# EAGLE board board (EAGLE 9.7.0)
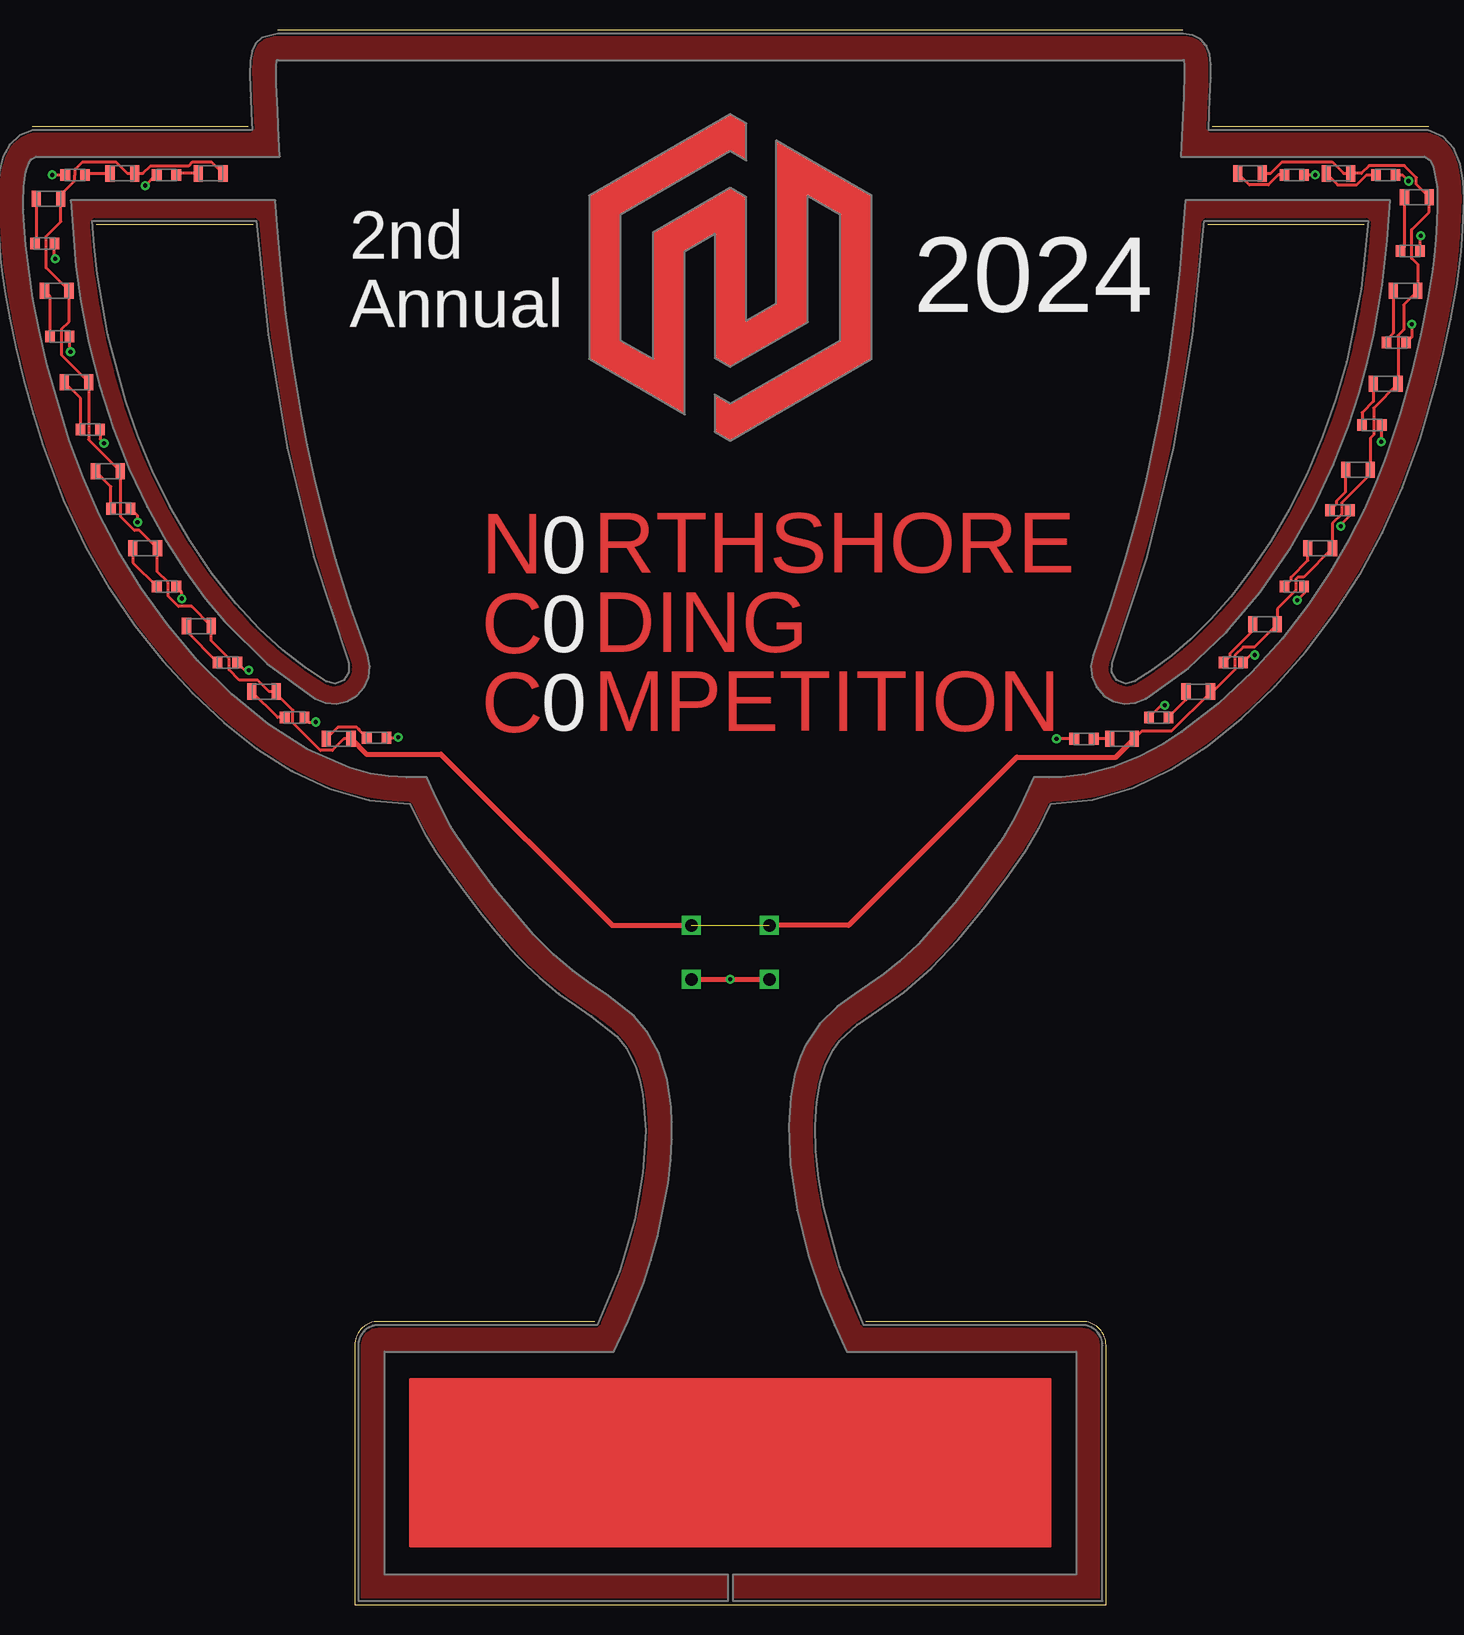
[diagram p0: board, top side]
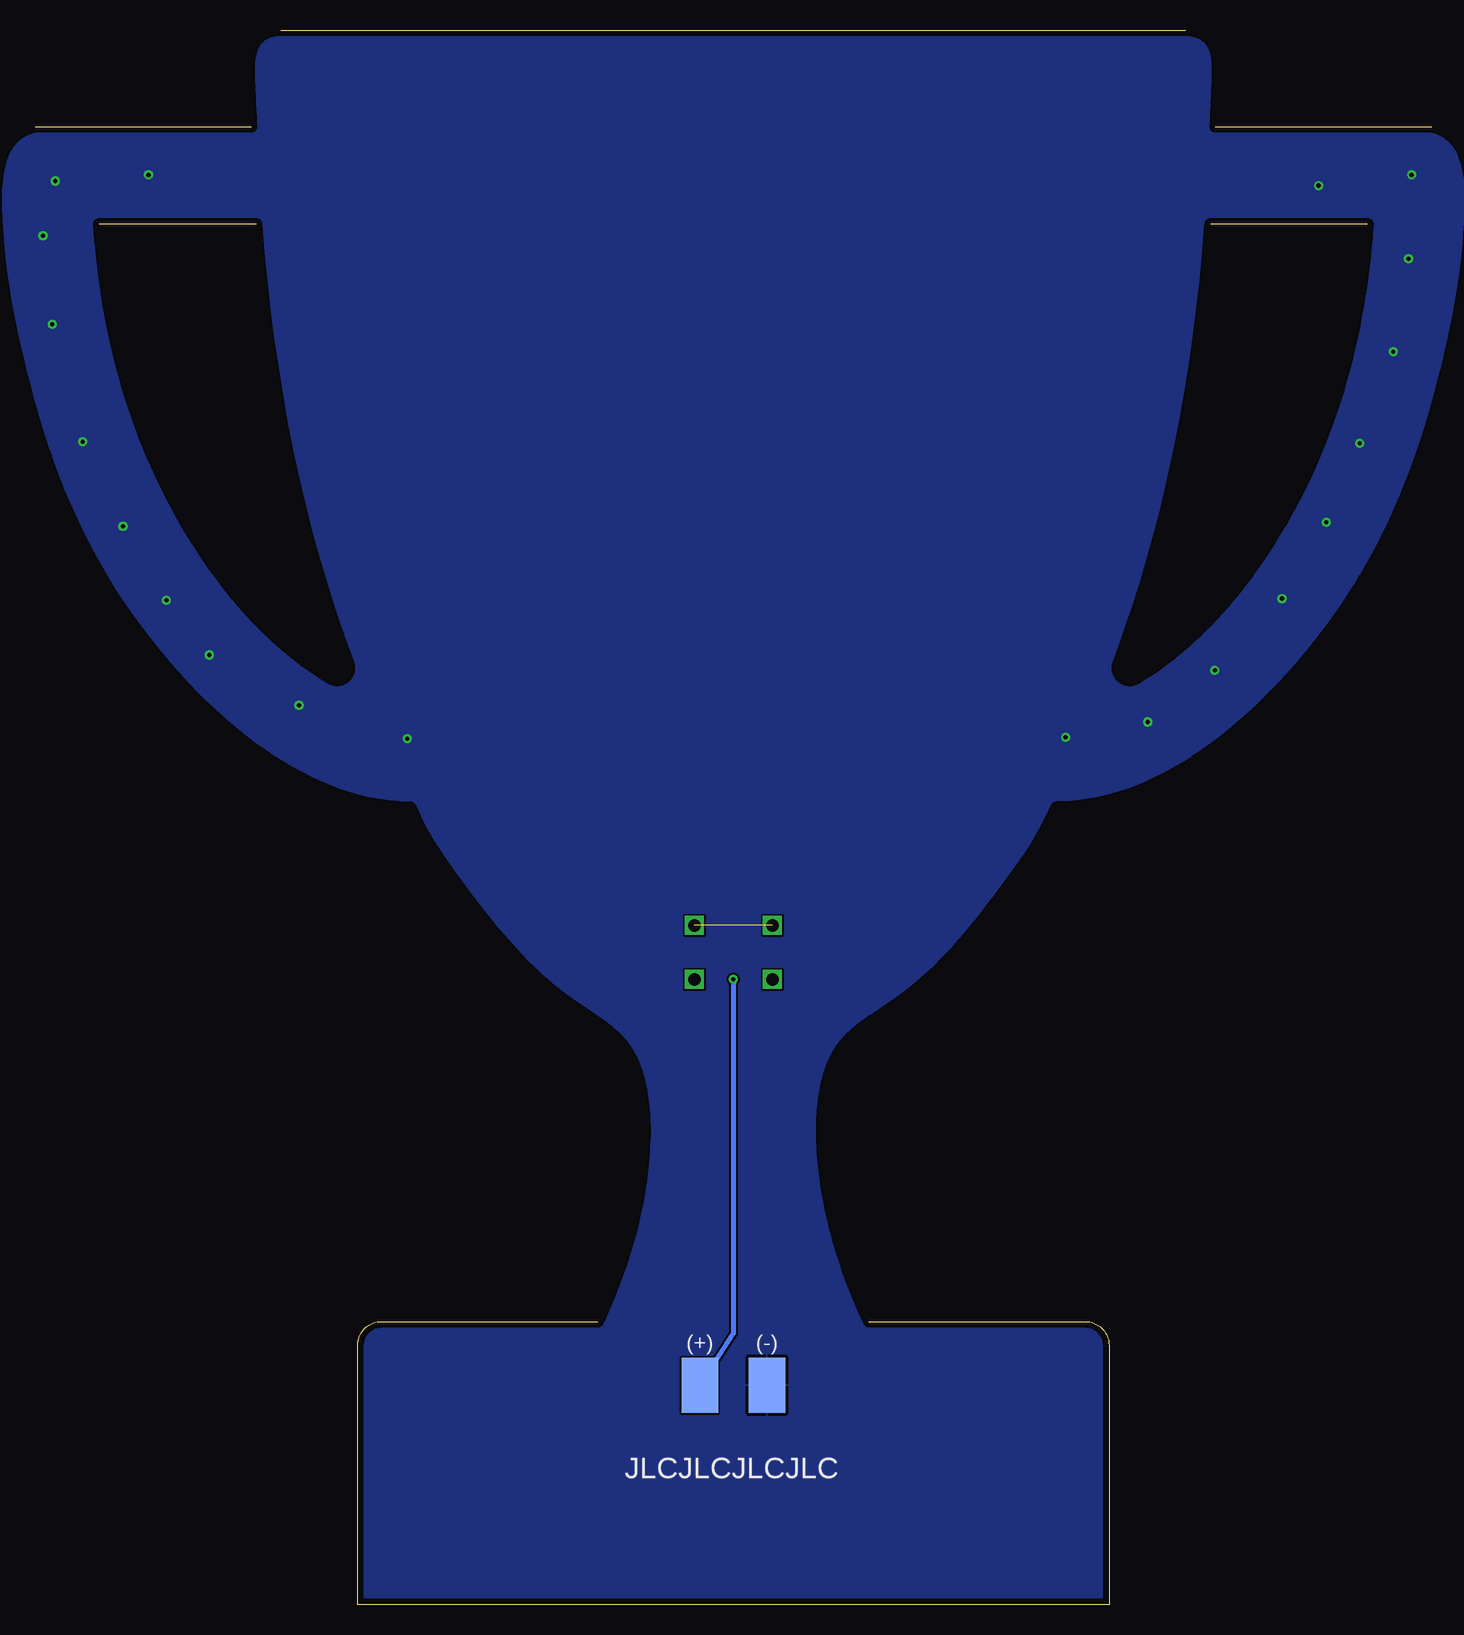
[diagram p1: board, bottom side, seen from below]

Size 116.37 x 131.21 mm. Coordinates in mm from the lower left corner, seen from the top.
Outline: 97.95,115.01 111.03,115.01
Outline: 5.34,115.01 18.42,115.01
Outline: 95.89,131.21 20.49,131.21
Outline: 18.02,123.17 0,123.17
Outline: 46.9,23.58 28.86,23.58 arc90 26.88,21.61 26.88,0 89.49,0 89.49,21.61 arc90 87.51,23.58 69.47,23.58
Outline: 116.37,123.17 98.35,123.17
Copper layers (1*16): Top / Bottom
Stack-up Default Layer Stack: Top User Defined 0.035mm / Dielectric-1 User Defined 1.5mm / Bottom User Defined 0.035mm
Design rules: minimum drill size 0.35mm, minimum copper width 6mil, keepout clearance 0mil, drill distance 6mil, via restrict clearance 0mil, dimension clearance 20mil, restrict clearance 0mil, copper clearance wire_polygon to wire_polygon 6mil, copper clearance wire_polygon to pad_smd 6mil, copper clearance wire_polygon to via 6mil, copper clearance pad_smd to pad_smd 6mil, copper clearance pad_smd to via 6mil, copper clearance via to via 6mil, copper clearance smd to pad (same net) 6mil, copper clearance smd to via (same net) 6mil, copper clearance smd to smd (same net) 6mil

## Footprints (pad centres in the part's own frame; a part is rotated, then mirrored left to right if it is on the bottom)
LEDC2012X110N_FLAT-Y = smd 0.762 x 1.362: A 1.025,0; C -1.025,0
RESC1608X60 = smd 0.799 x 0.974: 1 -0.815,0; 2 0.815,0
6X6MM_THT_TACTILE_SWITCH = drill 1.05 square: A -3.25,2.25; B 3.25,2.25; C -3.25,-2.25; D 3.25,-2.25
POWER_PADS = smd 3.048 x 4.572: GND 2.794,0; VCC -2.794,0

## Placement (x,y rotation side)
D1  LED  [LEDC2012X110N_FLAT-Y]  90.82,72.15 0 top
D2  LED  [LEDC2012X110N_FLAT-Y]  97.17,76.08 0 top
D3  LED  [LEDC2012X110N_FLAT-Y]  102.73,81.69 0 top
D4  LED  [LEDC2012X110N_FLAT-Y]  107.33,88.02 0 top
D5  LED  [LEDC2012X110N_FLAT-Y]  110.49,94.57 0 top
D6  LED  [LEDC2012X110N_FLAT-Y]  112.8,101.74 0 top
D7  LED  [LEDC2012X110N_FLAT-Y]  114.45,109.49 0 top
D8  LED  [LEDC2012X110N_FLAT-Y]  115.39,117.28 0 top
D9  LED  [LEDC2012X110N_FLAT-Y]  108.86,119.26 0 top
D10  LED  [LEDC2012X110N_FLAT-Y]  101.49,119.26 0 top
D11  LED  [LEDC2012X110N_FLAT-Y]  25.55,72.15 0 top
D12  LED  [LEDC2012X110N_FLAT-Y]  19.32,76.08 0 top
D13  LED  [LEDC2012X110N_FLAT-Y]  13.89,81.55 0 top
D14  LED  [LEDC2012X110N_FLAT-Y]  9.42,88.02 0 top
D15  LED  [LEDC2012X110N_FLAT-Y]  6.3,94.45 0 top
D16  LED  [LEDC2012X110N_FLAT-Y]  3.7,101.87 0 top
D17  LED  [LEDC2012X110N_FLAT-Y]  2.05,109.49 0 top
D18  LED  [LEDC2012X110N_FLAT-Y]  1.37,117.16 0 top
D19  LED  [LEDC2012X110N_FLAT-Y]  7.51,119.26 0 top
D20  LED  [LEDC2012X110N_FLAT-Y]  14.88,119.26 0 top
R1  120 Ω  [RESC1608X60]  87.65,72.14 180 top
R2  120 Ω  [RESC1608X60]  93.87,73.93 180 top
R3  120 Ω  [RESC1608X60]  100.1,78.5 0 top
R4  120 Ω  [RESC1608X60]  105.18,84.85 0 top
R5  120 Ω  [RESC1608X60]  108.99,91.2 0 top
R6  120 Ω  [RESC1608X60]  111.65,98.31 0 top
R7  120 Ω  [RESC1608X60]  113.68,105.17 0 top
R8  120 Ω  [RESC1608X60]  114.83,112.79 0 top
R9  120 Ω  [RESC1608X60]  112.8,119.14 0 top
R10  120 Ω  [RESC1608X60]  105.18,119.14 0 top
R11  120 Ω  [RESC1608X60]  28.7,72.24 0 top
R12  120 Ω  [RESC1608X60]  21.86,73.93 0 top
R13  120 Ω  [RESC1608X60]  16.28,78.5 0 top
R14  120 Ω  [RESC1608X60]  11.2,84.85 0 top
R15  120 Ω  [RESC1608X60]  7.39,91.32 0 top
R16  120 Ω  [RESC1608X60]  4.85,97.93 0 top
R17  120 Ω  [RESC1608X60]  2.31,105.68 0 top
R18  120 Ω  [RESC1608X60]  1.04,113.42 0 top
R19  120 Ω  [RESC1608X60]  3.58,119.14 180 top
R20  120 Ω  [RESC1608X60]  11.2,119.13 180 top
SW1  6X6MM_THT_TACTILE_SWITCH  [6X6MM_THT_TACTILE_SWITCH]  58.19,54.35 180 top
U$1  POWER_PADS  [POWER_PADS]  58.19,18.27 0 bottom

## Library data of the parts
D1-D20 = copy-of-leds; CATEGORY: LED; COLOR: YELLOW; DESCRIPTION: CHIP LED FLAT; SUB-CATEGORY: CHIP; TYPE: FLAT_TOP
R1-R20 = copy-of-resistors; CATEGORY: Resistor; SUB-CATEGORY: Fixed
SW1 = 6x6mm_THT_TACTILE_SWITCH
U$1 = POWER_PADS

## Nets
GND: R1.2 R2.2 R3.2 R4.2 R5.2 R6.2 R7.2 R8.2 R9.2 R10.2 R11.2 R12.2 R13.2 R14.2 R15.2 R16.2 R17.2 R18.2 R19.2 R20.2 U$1.GND
N$1: D1.C R1.1
N$5: D2.C R2.1
N$7: D3.C R3.1
N$9: D4.C R4.1
N$11: D5.C R5.1
N$13: D6.C R6.1
N$14: D1.A D2.A D3.A D4.A D5.A D6.A D7.A D8.A D9.A D10.A D11.A D12.A D13.A D14.A D15.A D16.A D17.A D18.A D19.A D20.A SW1.C SW1.D
N$15: D7.C R7.1
N$17: D8.C R8.1
N$19: D9.C R9.1
N$21: D10.C R10.1
N$23: D11.C R11.1
N$25: D12.C R12.1
N$27: D13.C R13.1
N$29: D14.C R14.1
N$31: D15.C R15.1
N$33: D16.C R16.1
N$35: D17.C R17.1
N$37: D18.C R18.1
N$39: D19.C R19.1
N$41: D20.C R20.1
VCC: SW1.A SW1.B U$1.VCC

## Tracks (layer width: path | path; a pad name or v marks a point on that pad's centre or on a via)
GND  (via drill 0.35)
  Top 0.254: R10.2 v106.92,119.14 | R9.2 114.19,119.14 v114.7,118.63 | R8.2 115.64,113.98 v115.72,114.06 | R7.2 114.95,105.62 v114.95,106.69 | R6.2 112.47,96.97 v112.41,96.91 | R5.2 109.8,90.74 109.05,89.99 v109.05,89.86 | R4.2 105.99,84.27 v105.43,83.7 | R3.2 101.55,79.13 v101.87,79.13 | R2.2 93.95,74.81 94.25,74.81 v94.38,74.94 | R11.2 30.46,72.24 v30.5,72.27 | R12.2 23.06,73.54 v23.64,73.54 | R13.2 17.73,77.86 v18.05,77.86 | R14.2 12.47,84.39 v12.47,83.83 | R15.2 8.78,90.74 v8.78,90.18 | R16.2 5.66,97.11 v5.99,96.79 | R17.2 3.12,104.48 v3.19,104.41 | R18.2 1.85,112.23 v1.92,112.15 | v1.67,119.14 R19.2 | v9.42,118.25 10.3,119.13 R20.2 | R1.2 v85.37,72.14
  Top 0.406: v85.37,72.14 v85.36,72.15
  pour Bottom: -18.01,140.73 138.2,140.73 138.2,-15.48 -16.74,-15.48 -18.01,-14.21
N$1
  Top 0.254: R1.1 D1.C
N$4
  pour Top: 3.65,111.53 3.2,117.01 20.27,117.01 20.47,114.39 20.76,111.23 21.15,107.59 21.71,103.52 22.46,99.07 22.93,96.65 23.54,93.84 24.33,90.63 25.31,87.07 26.51,83.21 27.96,79.1 28.14,78.19 28.05,77.27 27.67,76.43 27.06,75.73 26.26,75.26 25.36,75.06 24.44,75.13 23.59,75.49 19.58,78.4 16.05,81.88 14.44,83.83 12.8,86.06 11.17,88.61 9.59,91.46 8.09,94.62 6.74,98.04 5.62,101.54 4.73,105.11 4.06,108.56
N$5
  Top 0.254: R2.1 96.15,75.39 D2.C
N$6
  pour Top: 88.41,79.1 88.23,78.19 88.33,77.27 88.7,76.42 89.31,75.73 90.11,75.26 91.01,75.05 91.93,75.13 92.78,75.49 96.34,78.02 99.52,81.01 102.34,84.36 104.8,87.96 106.83,91.55 108.43,94.97 109.67,98.14 110.59,100.99 111.26,103.48 111.79,105.78 112.52,109.96 112.92,113.68 113.17,117.01 96.1,117.01 95.9,114.39 95.62,111.23 95.22,107.59 94.66,103.52 93.91,99.07 93.44,96.65 92.83,93.84 92.05,90.63 91.06,87.07 89.86,83.21
N$7
  Top 0.254: R3.1 99.83,79.04 99.83,79.27 101.71,81.15 D3.C
N$8
  pour Top: 257 corners
N$9
  Top 0.254: R4.1 104.91,85.39 104.91,85.62 106.31,87.02 D4.C
N$10
  pour Top: 31.52,18.81 31.52,4.84 84.86,4.84 84.86,18.81
N$11
  Top 0.254: R5.1 108.72,91.74 108.72,91.97 109.46,92.72 D5.C
N$13
  Top 0.254: D6.C 111.77,100.26 110.84,99.33 R6.1
N$14  (1 unrouted)
  Top 0.254: D10.A 103.21,119.26 104.17,120.22 108.33,120.22 109.29,119.26 D9.A 110.77,119.26 111.41,119.9 114.36,119.9 115.36,118.9 115.36,118.34 D8.A 116.42,116.03 114.96,114.57 114.96,112.18 115.47,111.68 D7.A 114.3,108.31 114.3,106.25 113.82,105.77 D6.A | D1.A 92.48,72.78 94.94,72.78 98.2,76.04 D2.A 98.4,76.08 100.23,77.91 100.23,79.1 100.92,79.79 101.86,79.79 D3.A 103.76,82.97 105.31,84.52 105.31,85.45 105.48,85.61 105.95,85.61 D4.A 108.36,90.11 109.12,90.87 109.12,91.8 111.51,94.19 D5.A 111.51,97.19 111.79,97.47 111.79,99.71 D6.A | D11.A 25.98,72.15 25.02,71.19 24.02,71.19 21.73,73.49 21.73,74.53 20.35,75.91 D12.A 19.76,76.08 18.8,77.04 17.26,77.04 16.41,77.89 16.41,78.83 14.91,80.33 D13.A 13.28,83.17 12.19,83.17 11.33,84.04 11.33,85.18 10.44,86.07 D14.A 8.94,89.52 8.51,89.52 7.39,90.65 7.39,94.39 D15.A 4.71,97.07 4.71,101.85 D16.A 2.44,104.15 2.44,106.28 3.08,106.91 D17.A 1.17,111.39 1.17,114.03 2.39,115.24 D18.A 2.39,117.49 3.57,118.66 3.57,119.13 3.58,119.15 3.58,119.61 4.2,120.22 6.98,120.22 7.94,119.26 D19.A 9.23,119.26 9.87,119.9 12.53,119.9 | 12.53,119.9 | 12.53,119.9 13.03,119.9 13.36,120.22 14.94,120.22 D20.A | D6.A
  Top 0.406: D11.A 27.84,70.88 34.06,70.88 48.33,56.6 SW1.D | D1.A 90.32,70.62 82.06,70.62 68.04,56.6 SW1.C
N$15
  Top 0.254: D7.C 113.42,105.95 112.87,105.39 R7.1
N$17
  Top 0.254: D8.C 114.37,113.14 R8.1
N$19
  Top 0.254: R9.1 111.21,119.14 110.38,118.3 108.79,118.3 D9.C
N$21
  Top 0.254: R10.1 103.85,119.14 103.01,118.3 101.43,118.3 D10.C
N$23
  Top 0.254: R11.1 27.23,72.89 27.23,72.94 27.07,73.11 25.48,73.11 D11.C
N$25
  Top 0.254: R12.1 20.46,73.93 D12.C
N$27
  Top 0.254: R13.1 12.86,81.09 D13.C
N$29
  Top 0.254: R14.1 8.39,86.84 D14.C
N$31
  Top 0.254: R15.1 6.57,93.16 D15.C
N$33
  Top 0.254: R16.1 4.03,100.51 D16.C
N$35
  Top 0.254: R17.1 1.49,109.02 D17.C
N$37
  Top 0.254: D18.C 0.34,113.54 R18.1
N$39
  Top 0.254: R19.1 4.52,119.26 D19.C
N$41
  Top 0.254: R20.1 12.14,119.26 D20.C
VCC  (via drill 0.35)
  Top 0.406: SW1.B v58.19,52.1 SW1.A
  Bottom 0.406: v58.19,52.1 58.19,22.59 U$1.VCC
(copper drawn outside any net)
  Top 0.152: 31.52,18.81 84.86,18.81 84.86,4.84 31.52,4.84 31.52,18.81
  shapes: Top area x2

## Text on the board
Top: N / C / C | RTHSHORE / DING / MPETITION
SilkscreenTop: 2024 | 2nd / Annual | 0 / 0 / 0
SilkscreenBottom: JLCJLCJLCJLC
SolderMaskTop: N / C / C | RTHSHORE / DING / MPETITION